# EAGLE board labwiz-module_t420 (EAGLE 6.5.0)
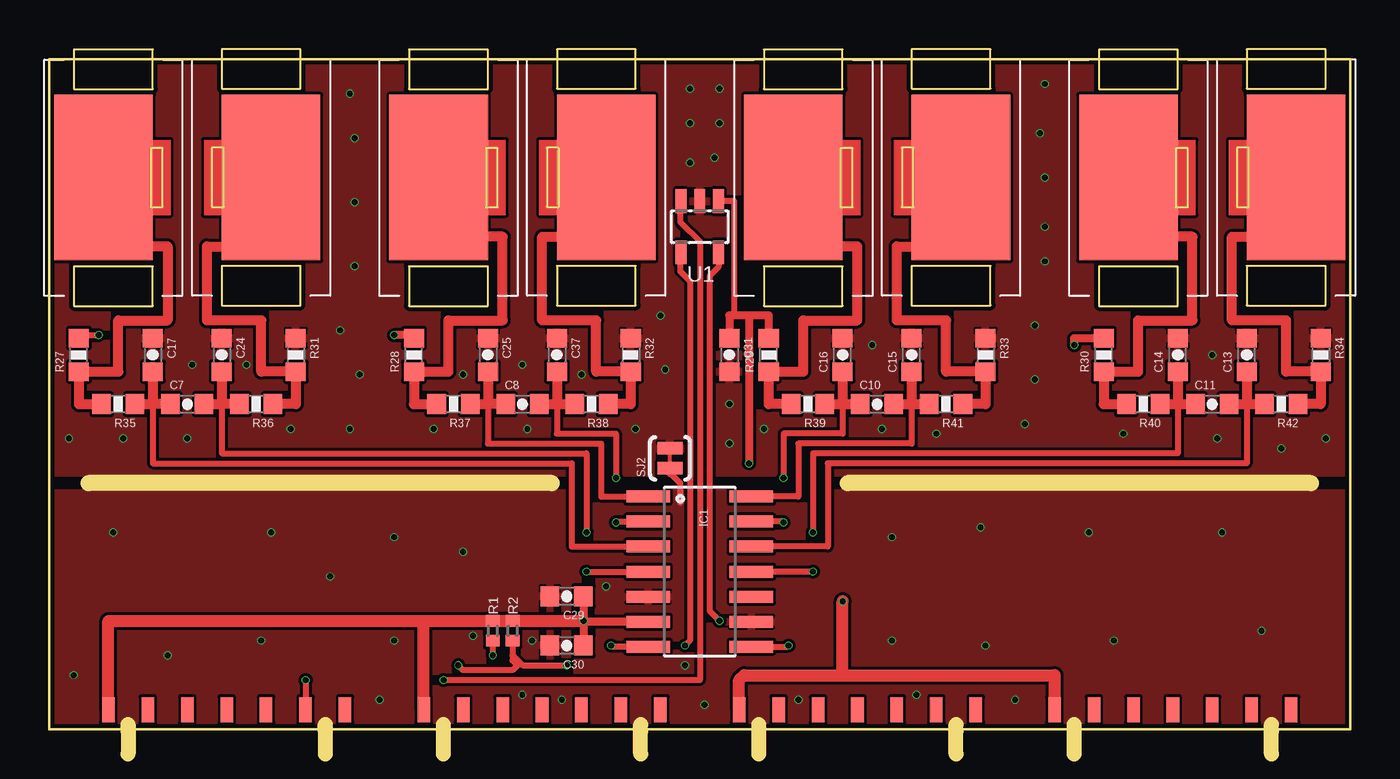
[diagram p0: board, top side]
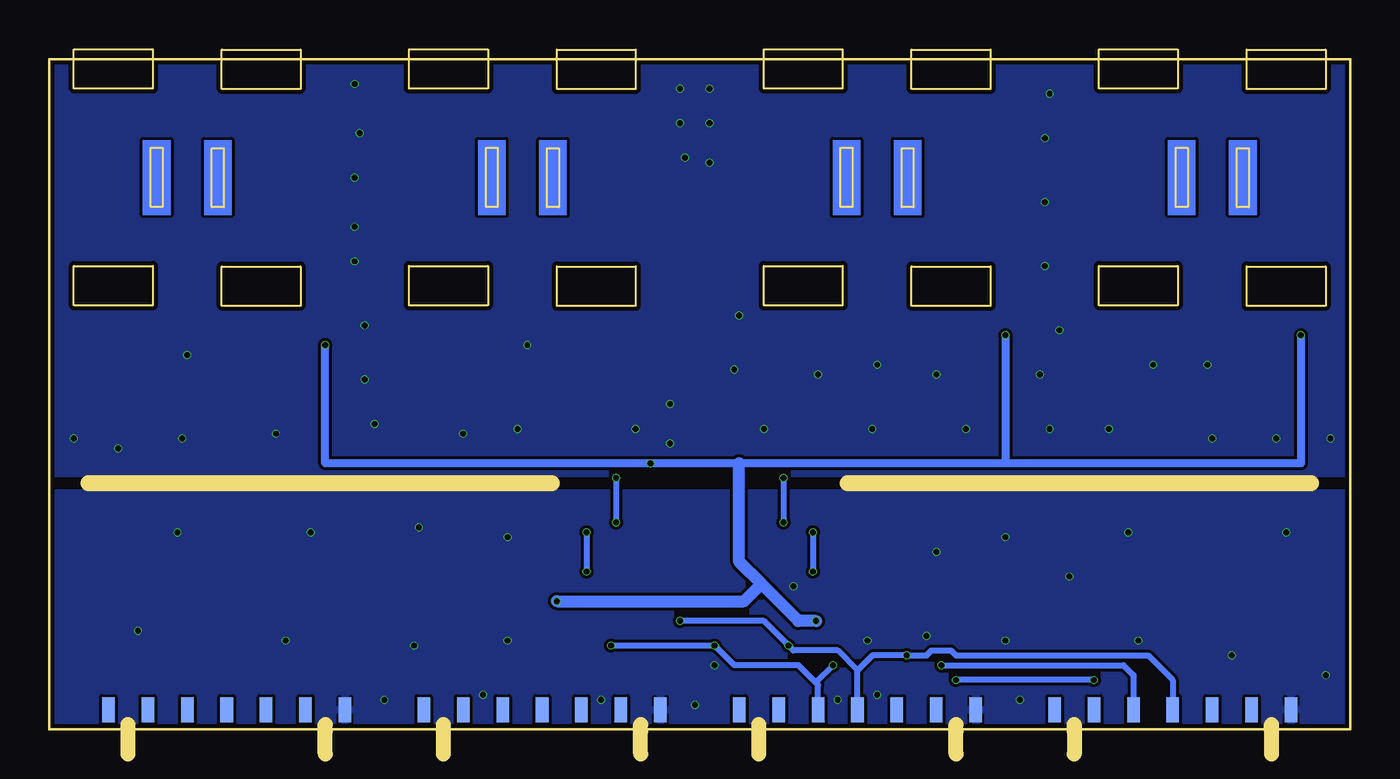
[diagram p1: board, bottom side, seen from below]

Size 66 x 34 mm. Coordinates in mm from the lower left corner, seen from the top.
Outline: 0,34 0,0 66,0 66,34 0,34
Copper layers (1*2+15*16): Top 0.017mm / dielectric 0.5mm / GND 0.017mm / dielectric 0.075mm / 3.3V 0.017mm / dielectric 0.5mm / Bottom 0.017mm
Design rules "PaxInstrument-T400 *": minimum track width 0.1mm, minimum drill 0.2mm, track to track 0.075mm, track to pad 0.075mm, pad to pad 0.075mm, via to via 0.075mm, smd to smd 0.075mm, copper to edge 0.2mm, drill to drill 0.2mm, minimum pad ring 0.5mm, minimum via ring 0.05mm, stop-mask expansion 0.01mm, vias tented up to drill 0.25mm, thermal gap 0.1mm
Net classes: 0 Digital signal: width 0.1 mm, drill 0.2 mm, clearance 0.15 mm; 1 3.3V power: width 0.1 mm, drill 0.2 mm, clearance 0.15 mm; 2 RTC battery: width 0.1 mm, drill 0.2 mm, clearance 0.15 mm; 3 5V power: width 0.1 mm, drill 0.2 mm, clearance 0.15 mm; 4 Analog signal: width 0.1 mm, drill 0.2 mm, clearance 0.15 mm; 5 GND: width 0.1 mm, drill 0.2 mm, clearance 0.15 mm
Milling: 10 lines

## Footprints (pad centres in the part's own frame; a part is rotated, then mirrored left to right if it is on the bottom)
SPARKFUN-CAPACITORS_0603-CAP = smd 0.94 x 1.016: 1 -0.85,0; 2 0.85,0
SO14 = smd 0.61 x 2.21: 1 -3.81,-2.616; 2 -2.54,-2.616; 3 -1.27,-2.616; 4 0,-2.616; 5 1.27,-2.616; 6 2.54,-2.616; 7 3.81,-2.616; 8 3.81,2.616; 9 2.54,2.616; 10 1.27,2.616; 11 0,2.616; 12 -1.27,2.616; 13 -2.54,2.616; 14 -3.81,2.616
M07X2_2MM_EDGE = smd 0.635 x 1.27: P$1 0,0; P$3 2,0; P$5 4,0; P$7 6,0; P$9 8,0; P$11 10,0; P$13 12,0 | smd 0.635 x 1.27 bottom: P$2 0,0; P$4 2,0; P$6 4,0; P$8 6,0; P$10 8,0; P$12 10,0; P$14 12,0
0402 = smd 0.6 x 0.7: 1 -0.5,0; 2 0.5,0
SPARKFUN-RESISTORS_0603-RES = smd 0.94 x 1.016: 1 -0.85,0; 2 0.85,0
PAD-JUMPER-2-NC_BY_TRACE_YES_SILK = smd 0.635 x 1.27: 1 -0.508,0; 2 0.508,0
SOT23-5L = smd 0.55 x 1.2: 1 -0.95,-1.3; 2 0,-1.3; 3 0.95,-1.3; 4 0.95,1.3; 5 -0.95,1.3
TC-CLIP-SINGLE = smd 5 x 8.4: P$1 -0.5,0

## Placement (x,y rotation side)
C7  1uF  [SPARKFUN-CAPACITORS_0603-CAP]  7,16.5 0 top
C8  1uF  [SPARKFUN-CAPACITORS_0603-CAP]  24,16.5 0 top
C10  1uF  [SPARKFUN-CAPACITORS_0603-CAP]  42,16.5 0 top
C11  1uF  [SPARKFUN-CAPACITORS_0603-CAP]  59,16.5 0 top
C13  0.1uF  [SPARKFUN-CAPACITORS_0603-CAP]  60.75,19 90 top
C14  0.1uF  [SPARKFUN-CAPACITORS_0603-CAP]  57.25,19 90 top
C15  0.1uF  [SPARKFUN-CAPACITORS_0603-CAP]  43.75,19 90 top
C16  0.1uF  [SPARKFUN-CAPACITORS_0603-CAP]  40.25,19 90 top
C17  0.1uF  [SPARKFUN-CAPACITORS_0603-CAP]  5.25,19 270 top
C24  0.1uF  [SPARKFUN-CAPACITORS_0603-CAP]  8.75,19 270 top
C25  0.1uF  [SPARKFUN-CAPACITORS_0603-CAP]  22.25,19 270 top
C29  0.1uF  [SPARKFUN-CAPACITORS_0603-CAP]  26.25,6.75 180 top
C30  1uF  [SPARKFUN-CAPACITORS_0603-CAP]  26.25,4.25 180 top
C31  0.1uF  [SPARKFUN-CAPACITORS_0603-CAP]  34.5,19 270 top
C37  0.1uF  [SPARKFUN-CAPACITORS_0603-CAP]  25.75,19 270 top
IC1  MCP3424  [SO14]  33,8 270 top
MODULE5  PI-module-male  [M07X2_2MM_EDGE]  15,1 180 top
MODULE6  PI-module-male  [M07X2_2MM_EDGE]  31,1 180 top
MODULE7  PI-module-male  [M07X2_2MM_EDGE]  47,1 180 top
MODULE8  PI-module-male  [M07X2_2MM_EDGE]  63,1 180 top
R1  1.5k  [0402]  22.5,5 270 top
R2  1.5k  [0402]  23.5,5 270 top
R27  1M  [SPARKFUN-RESISTORS_0603-RES]  1.5,19 90 top
R28  1M  [SPARKFUN-RESISTORS_0603-RES]  18.5,19 90 top
R29  1M  [SPARKFUN-RESISTORS_0603-RES]  36.5,19 90 top
R30  1M  [SPARKFUN-RESISTORS_0603-RES]  53.5,19 90 top
R31  1M  [SPARKFUN-RESISTORS_0603-RES]  12.5,19 270 top
R32  1M  [SPARKFUN-RESISTORS_0603-RES]  29.5,19 270 top
R33  1M  [SPARKFUN-RESISTORS_0603-RES]  47.5,19 270 top
R34  1M  [SPARKFUN-RESISTORS_0603-RES]  64.5,19 270 top
R35  499R  [SPARKFUN-RESISTORS_0603-RES]  3.5,16.5 180 top
R36  499R  [SPARKFUN-RESISTORS_0603-RES]  10.5,16.5 180 top
R37  499R  [SPARKFUN-RESISTORS_0603-RES]  20.5,16.5 180 top
R38  499R  [SPARKFUN-RESISTORS_0603-RES]  27.5,16.5 180 top
R39  499R  [SPARKFUN-RESISTORS_0603-RES]  38.5,16.5 180 top
R40  499R  [SPARKFUN-RESISTORS_0603-RES]  55.5,16.5 180 top
R41  499R  [SPARKFUN-RESISTORS_0603-RES]  45.5,16.5 180 top
R42  499R  [SPARKFUN-RESISTORS_0603-RES]  62.5,16.5 180 top
SJ2  JUMPER-PAD-2-NC_BY_TRACE  [PAD-JUMPER-2-NC_BY_TRACE_YES_SILK]  31.5,13.75 90 top
U1  MCP9800  [SOT23-5L]  33,25.5 180 top
U$7  TC-MINI-SINGLE  [TC-CLIP-SINGLE]  3.25,28 0 top
U$8  TC-MINI-SINGLE  [TC-CLIP-SINGLE]  10.75,28 180 top
U$9  TC-MINI-SINGLE  [TC-CLIP-SINGLE]  20.25,28 0 top
U$15  TC-MINI-SINGLE  [TC-CLIP-SINGLE]  27.75,28 180 top
U$16  TC-MINI-SINGLE  [TC-CLIP-SINGLE]  38.25,28 0 top
U$17  TC-MINI-SINGLE  [TC-CLIP-SINGLE]  45.75,28 180 top
U$18  TC-MINI-SINGLE  [TC-CLIP-SINGLE]  55.25,28 0 top
U$19  TC-MINI-SINGLE  [TC-CLIP-SINGLE]  62.75,28 180 top

## Library data of the parts
C7 C8 C10 C11 C13-C17 C24 C25 C29-C31 C37 R27-R34 = PaxInstrument-T400
IC1 = JeeLabs; MF: Microchip Technology; MPN: MCP3424-E/SL
MODULE5-MODULE8 = PaxInstruments-Connectors; MF: Pax Instruments; MPN: PIxxxx
R1 R2 = PaxInstruments-RCL
R35-R42 = PaxInstrument-T400; MF: Vishay; MPN: TNPW0603499RBEEA
SJ2 = SparkFun-Passives; MF: N/A; MPN: N/A
U1 = newparts_2010; MF: Microchip Technology; MPN: MCP9800A0T-M/OT
U$7-U$9 U$15-U$19 = PaxInstruments-Connectors; MF: Pax Instrument; MPN: Thermo-clip2

## Nets
3.3V: C29.1 C30.1 C31.1 IC1.6 MODULE5.P$13 MODULE6.P$13 MODULE7.P$13 MODULE8.P$13 R1.1 R2.1 R27.2 R28.2 R29.2 R30.2 U1.1
ALERT: MODULE5.P$3 U1.3
GND: C29.2 C30.2 IC1.5 IC1.9 MODULE5.P$14 MODULE6.P$14 MODULE7.P$14 MODULE8.P$14 SJ2.1
I2C1_SCL: IC1.8 MODULE5.P$6 MODULE6.P$6 R2.2 U1.4
I2C1_SDA: IC1.7 MODULE5.P$8 MODULE6.P$8 R1.2 U1.5
ISOTHERMAL: C13.2 C14.2 C15.2 C16.2 C17.1 C24.1 C25.1 C31.2 C37.1 R31.1 R32.1 R33.1 R34.1 SJ2.2 U1.2
N$1: R27.1 R35.2 U$7.P$1
N$4: R32.2 R38.1 U$15.P$1
N$5: R31.2 R36.1 U$8.P$1
N$10: R28.1 R37.2 U$9.P$1
N$12: R30.1 R40.2 U$18.P$1
N$13: R29.1 R39.2 U$16.P$1
N$14: R33.2 R41.1 U$17.P$1
N$16: R34.2 R42.1 U$19.P$1
SPI2_NSS: MODULE5.P$5
SPI2_SCK: MODULE5.P$7
TC1+: C7.1 C17.2 IC1.3 R35.1
TC1-: C7.2 C24.2 IC1.4 R36.2
TC2+: C8.1 C25.2 IC1.1 R37.1
TC2-: C8.2 C37.2 IC1.2 R38.2
TC3+: C10.1 C16.1 IC1.13 R39.1
TC3-: C10.2 C15.1 IC1.14 R41.2
TC4+: C11.1 C14.1 IC1.11 R40.1
TC4-: C11.2 C13.1 IC1.12 R42.2

## Tracks (layer width: path | path; a pad name or v marks a point on that pad's centre or on a via)
3.3V  (via drill 0.3)
  Top 0.305: 34.5,21 34.75,21 34.75,26.8 U1.1 | R27.2 1.5,20 v2.5,20
  Top 0.406: v52,19.5 52,19.85 R30.2 | R28.2 18.5,20 v17.5,20 | R29.2 36.5,21 35.5,21 | 35.5,21 v35.5,13.5 | 35.5,21 34.5,21 C31.1 | C29.1 v27.1,5.5 | v27.1,5.5 C30.1 | IC1.6 27.14,5.46 v27.1,5.5
  Top 0.61: MODULE6.P$13 19,5.5 | 19,5.5 R1.1 R2.1 v27.1,5.5 | MODULE5.P$13 3,5.5 19,5.5 | MODULE7.P$13 35,2.5 35.25,2.75 40.25,2.75 | 40.25,2.75 51,2.75 MODULE8.P$13 | 40.25,2.75 v40.25,6.5
  Bottom 0.406: v2.5,20 2.5,13.5 17.5,13.5 | 17.5,13.5 31,13.5 v35.5,13.5 52,13.5 v52,19.5 | v17.5,20 17.5,13.5
  Bottom 0.61: v27.1,5.5 28,5.5 29.88,7.38 | 29.88,7.38 31,8.5 31,13.5 | v40.25,6.5 30.75,6.5 29.88,7.38
ALERT  (via drill 0.3)
  Top 0.305: U1.3 32,26.75 32,25.75 33,24.75 33,2.5 v20,2.5 | v13,2.5 MODULE5.P$3
  Bottom 0.305: v13,2.5 v20,2.5
GND  (via drill 0.3)
  Top 0.305: 31.5,13 32,12.5 32,11.5
  Top 0.406: SJ2.1 31.5,13
  other vias: 26,1.5 14.25,7.75 32.25,3.25 24.5,4.5 6,3.75 3.25,10 11.25,10 10.75,4.5 17.5,9.75 17.5,4.5 21,9 42.75,9.75 42.75,4.5 47.25,10.25 47.5,4.25 52.75,10 54,4.5 59.5,10 61.5,5 16.75,1.5 28.25,7.25 24,1.75 33.25,1.25 49,1.5 44,1.75 38,1.5 21.5,4.75 1.25,2.75
  pour Bottom: 0,12 0,0 66,0 66,12
  pour Top: 0,12 0,0 66,0 66,12
I2C1_SCL  (via drill 0.3)
  Top 0.305: U1.4 32,24.2 32,23.25 32.5,22.75 32.5,4.5 v32.25,4.25 | IC1.8 37.44,4.19 v37.5,4.25 | R2.2 23.5,3.75 | 23.5,3.75 24,3.25 v26.25,3.25 | 23.5,3.75 23.5,3.5 23.75,3.25 23.5,3 21,3 v20.75,3.25
  Bottom 0.305: v37.5,4.25 v32.25,4.25 31.25,3.25 28,3.25 27.12,2.38 | MODULE6.P$6 27,2.25 27.12,2.38 | v26.25,3.25 27.12,2.38 | v20.75,3.25 11.5,3.25 11,2.75 MODULE5.P$6
I2C1_SDA  (via drill 0.3)
  Top 0.305: U1.5 33.95,23.45 33.5,23 33.5,6 v34,5.5 | IC1.7 28.56,4.19 v28.5,4.25 | R1.2 v22.5,3.75
  Bottom 0.305: v34,5.5 29.75,5.5 v28.5,4.25 28.25,4 26,4 25,3 | MODULE6.P$8 25,3 | 25,3 24.25,3.75 v22.5,3.75 21.5,3.75 21.25,4 20.25,4 20,3.75 10.25,3.75 9,2.5 MODULE5.P$8
ISOTHERMAL  (via drill 0.3)
  other vias: 15.75,18 21,18 24,18.5 27,18 7.25,18.5 10,18.5 7,14.75 3.75,14.75 1,14.75 12.25,15.25 15.25,15.25 14.75,20.25 15.5,23.5 15.5,26.75 15.5,30 15.25,32.25 32.5,32.5 34,32.5 32.5,30.75 34,30.75 32.5,28.75 33.75,29 50.5,32.75 50.25,30.25 50.5,28 50.5,25.5 50.5,23.75 50,20.5 45,15 49.5,15.5 50,17.75 54.5,15 59.25,14.75 59,19 62.5,14.25 64.75,14.75 41.75,19.5 42.25,15.25 36.25,15.25 34.5,16.5 34.5,14.5 31,21 31.25,18.25 29.75,15.25 19.5,15.25 24.25,15.25
  pour Bottom: 0,34 66,34 66,13 0,13
  pour Top: 0,34 66,34 66,13 0,13
N$1
  Top 0.5: R35.2 1.5,16.5 R27.1 3.5,18.15 3.5,20.75 6,20.75 6,24.5 2.75,24.5 U$7.P$1
N$4
  Top 0.5: R38.1 29.5,16.5 R32.2 27.75,18.15 27.75,20.75 25,20.75 25,25 28.25,25 U$15.P$1
N$5
  Top 0.5: R36.1 12.5,16.5 R31.2 10.75,18.15 10.75,20.75 8,20.75 8,24.5 11.25,24.5 U$8.P$1
N$10
  Top 0.5: R37.2 18.5,16.5 R28.1 20.25,18.15 20.25,20.75 23,20.75 23,25 19.75,25 U$9.P$1
N$12
  Top 0.5: R40.2 53.5,16.5 R30.1 55.25,18.15 55.25,20.75 58,20.75 58,25 54.75,25 U$18.P$1
N$13
  Top 0.5: R39.2 36.5,16.5 R29.1 38.25,18.15 38.25,20.75 41,20.75 41,24.5 37.75,24.5 U$16.P$1
N$14
  Top 0.5: R41.1 47.5,16.5 R33.2 45.5,18.15 45.5,20.75 43,20.75 43,24.5 46.25,24.5 U$17.P$1
N$16
  Top 0.5: R42.1 64.5,16.5 R34.2 62.75,18.15 62.75,20.75 60,20.75 60,25 63.25,25 U$19.P$1
TC1+
  Top 0.305: 5.25,16.5 5.25,13.5 26.5,13.5 26.5,9.27 IC1.3
  Top 0.5: R35.1 5.25,16.5 | C17.2 5.25,16.5 | C7.1 5.25,16.5
TC1-  (via drill 0.3)
  Top 0.305: 8.75,16.5 8.75,14 27.25,14 v27.25,10 | v27.25,8 IC1.4
  Top 0.5: C7.2 8.75,16.5 | C24.2 8.75,16.5 | R36.2 8.75,16.5
  Bottom 0.305: v27.25,10 v27.25,8
TC2+
  Top 0.305: 22.25,16.5 22.25,14.5 28,14.5 28,11.81 IC1.1
  Top 0.5: R37.1 22.25,16.5 | C25.2 22.25,16.5 | C8.1 22.25,16.5
TC2-  (via drill 0.3)
  Top 0.305: 25.75,16.5 25.75,15 28.75,15 v28.75,12.75 | v28.75,10.5 28.75,10.54 IC1.2
  Top 0.5: C8.2 25.75,16.5 | 25.75,16.5 R38.2 | C37.2 25.75,16.5
  Bottom 0.305: v28.75,12.75 v28.75,10.5
TC3+  (via drill 0.3)
  Top 0.305: 40.25,16.5 40.25,15 37.25,15 v37.25,12.75 | v37.25,10.5 37.25,10.54 IC1.13
  Top 0.5: R39.1 40.25,16.5 | 40.25,16.5 C10.1 | C16.1 40.25,16.5
  Bottom 0.305: v37.25,12.75 v37.25,10.5
TC3-
  Top 0.305: 43.75,16.5 43.75,14.5 38,14.5 38,11.81 IC1.14
  Top 0.5: C10.2 43.75,16.5 | 43.75,16.5 R41.2 | C15.1 43.75,16.5
TC4+  (via drill 0.3)
  Top 0.305: 57.25,16.5 57.25,14 38.75,14 v38.75,10 | v38.75,8 IC1.11
  Top 0.5: R40.1 57.25,16.5 | 57.25,16.5 C11.1 | C14.1 57.25,16.5
  Bottom 0.305: v38.75,10 v38.75,8
TC4-
  Top 0.305: 60.75,16.5 60.75,13.5 39.5,13.5 39.5,9.27 IC1.12
  Top 0.5: C11.2 60.75,16.5 | 60.75,16.5 R42.2 | C13.1 60.75,16.5